# Altium PCB PCB1.PcbDoc (part 1 of 2)
Units mm, origin at the board's own origin, x right, y up, seen from the top; angles counter-clockwise.
Board outline 100 x 47.75 mm, 2 copper layers (Top Layer, Bottom Layer), stack 1.67 mm thick; 77 components, 59 nets, 309 pads, 126 vias.
Unrouted connection lines stored in the file: 4.
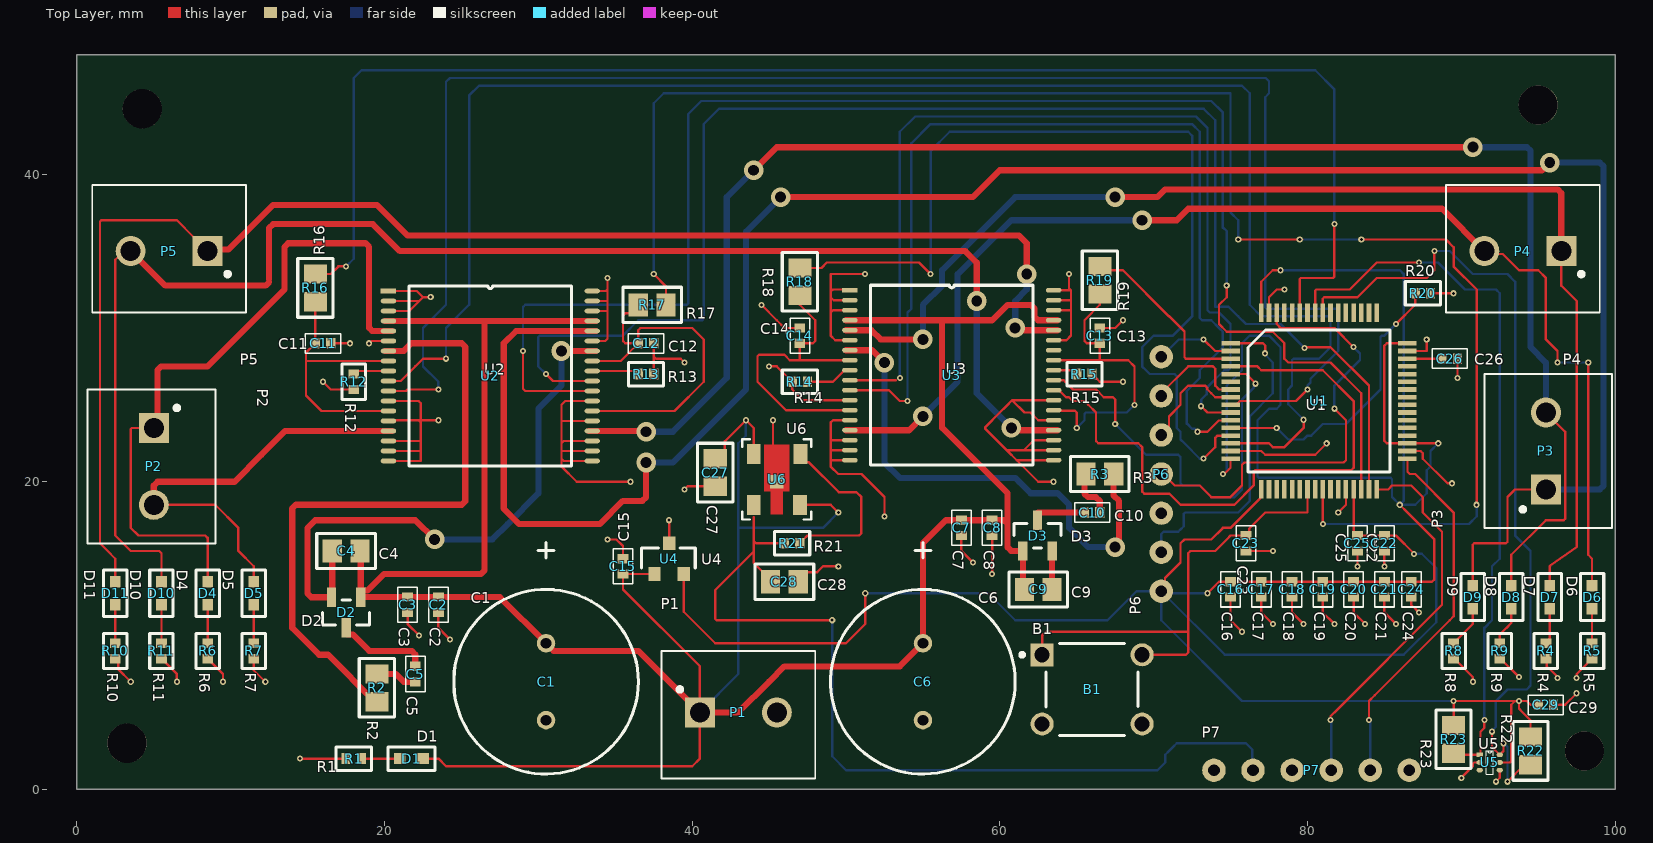
[diagram p0: Top Layer view]
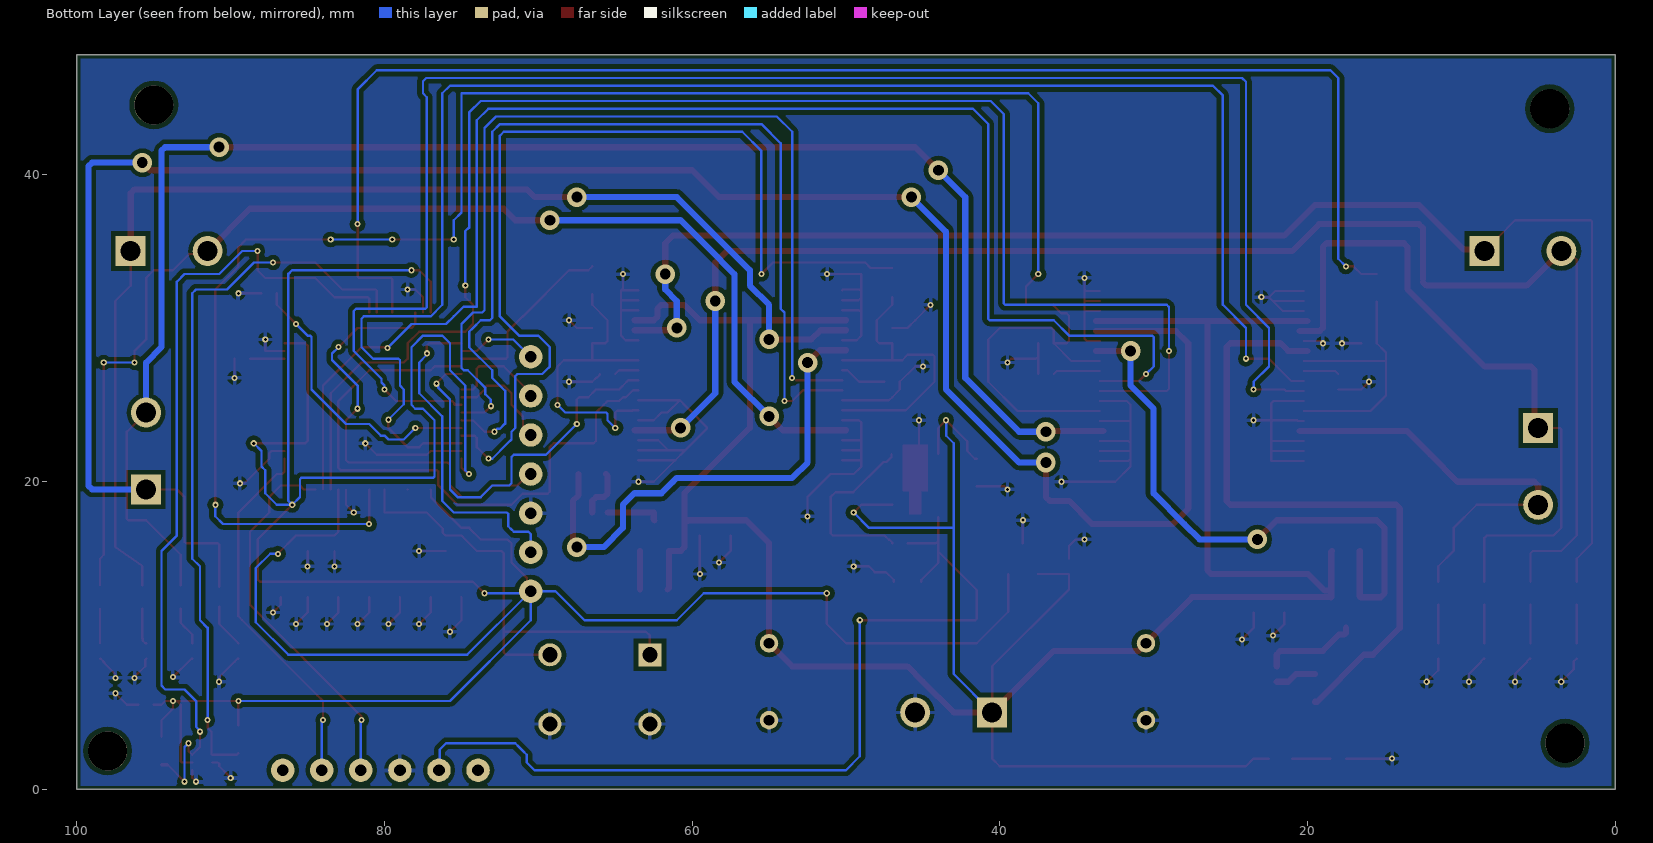
[diagram p1: Bottom Layer view, seen from below]

## Layer stack, top to bottom
Top Solder: solder mask 0.0254, SM-001, Dk 4
Top Layer: signal copper 0.035
Dielectric 1: core 1.6, Core-043, Dk 4.3
Bottom Layer: signal copper 0.035
Bottom Solder: solder mask 0.0254, SM-001, Dk 4

## Board outline
0,0 0,47.75 100,47.75 100,0

## Design rules (kind name [scope] priority, off if disabled: settings)
Clearance [All] p1: gap=0.3 ignorepadtopadclearanceinfootprint=TRUE except(0.01: Arc-SMDPad Arc-THPad Track-SMDPad Track-THPad; 0.2: Arc-Arc Arc-Track Track-Track)
PolygonConnect [All] p1: connectstyle=Relief reliefconductorwidth=0.254 reliefentries=4 polygonreliefangle="90 Angle" airgapwidth=0.254
RoutingVias [All] p1: holewidth=0.2 width=0.4 viastyle="Through Hole" minholewidth=0.2 minwidth=0.4 maxholewidth=0.6 maxwidth=1
SolderMaskExpansion [All] p1: expansion=0.102 istentingtop=FALSE
Width [All] p1: maxlimit=0.4 minlimit=0.15 preferedwidth=0.15 minimp=50.000000 maximp=50.000000 favimp=50.000000
30 further rules are at their usual default settings.

## Components (designator, comment, footprint, x,y, rotation, side; value= is the part's Value field where it differs from the comment)
B1 "RST" ResetButton 66,6.5 r0 top
C1 "100UF" 100UF 30.5,4.5 r90 top
C2 "100nF" "0402 Capacitor" 23.5,12 r270 top
C3 "100nF" "0402 Capacitor" 21.5,12 r270 top
C4 "220nF" "0805 Capacitor" 17.5,15.5 r0 top
C5 "10nF" "0402 Capacitor" 22,7.5 r270 top
C6 "100UF" 100UF 55,4.5 r90 top
C7 "100nF" "0402 Capacitor" 57.5,17 r270 top
C8 "100nF" "0402 Capacitor" 59.5,17 r270 top
C9 "220nF" "0805 Capacitor" 62.5,13 r0 top
C10 "10nF" "0402 Capacitor" 66,18 r0 top
C11 "5.6nF" "0402 Capacitor" 16,29 r0 top
C12 "5.6nF" "0402 Capacitor" 37,29 r0 top
C13 "5.6nF" "0402 Capacitor" 66.5,29.5 r270 top
C14 "5.6nF" "0402 Capacitor" 47,29.5 r270 top
C15 "100nF" "0402 Capacitor" 35.5,14.5 r90 top
C16 "100nF" "0402 Capacitor" 75,13 r270 top
C17 "100nF" "0402 Capacitor" 77,13 r270 top
C18 "100nF" "0402 Capacitor" 79,13 r270 top
C19 "100nF" "0402 Capacitor" 81,13 r270 top
C20 "100nF" "0402 Capacitor" 83,13 r270 top
C21 "100nF" "0402 Capacitor" 85,13 r270 top
C22 "100nF" "0402 Capacitor" 85,16 r270 top
C23 "100nF" "0402 Capacitor" 76,16 r270 top
C24 "4.7UF" "0402 Capacitor" 86.75,13 r270 top
C25 "1UF" "0402 Capacitor" 83.25,16 r270 top
C26 "4.7UF" "0402 Capacitor" 89.25,28 r0 top
C27 "10UF" "0805 Capacitor" 41.5,20.6 r270 top
C28 "10UF" "0805 Capacitor" 46,13.5 r0 top
C29 "10nF" "0402 Capacitor" 95.5,5.5 r0 top
D1 "GreenLED" LED 21.75,2 r180 top
D2 "BAR43S" "Double Diode" 17.5,11.5 r270 top
D3 "BAR43S" "Double Diode" 62.45,16.495 r90 top
D4 "YellowLED" LED 8.5,12.75 r270 top
D5 "YellowLED" LED 11.5,12.75 r270 top
D6 "YellowLED" LED 98.5,12.5 r270 top
D7 "YellowLED" LED 95.75,12.5 r270 top
D8 "YellowLED" LED 93.25,12.5 r270 top
D9 "YellowLED" LED 90.75,12.5 r270 top
D10 "YellowLED" LED 5.5,12.75 r270 top
D11 "YellowLED" LED 2.5,12.75 r270 top
P1 "Terminal Block" PHOENIX_1935161 43,5 r0 top
P2 "Terminal Block" PHOENIX_1935161 5,21 r270 top
P3 "Terminal Block" PHOENIX_1935161 95.5,22 r90 top
P4 "Terminal Block" PHOENIX_1935161 94,35 r180 top
P5 "Terminal Block" PHOENIX_1935161 6,35 r180 top
P6 "SWD/JTAG" FemaleSocketHeaders 71.5,12.88 r90 top
P7 "HC-05" 6FemaleSocketHeaders 73.92,0.25 r0 top
R1 "1.4k" "0402 Resistor" 18,2 r180 top
R2 "100R" "0805 Resistor" 19.5,6.6 r270 top
R3 "100R" "0805 Resistor" 66.5,20.5 r0 top
R4 "10k" "0402 Resistor" 95.5,9 r270 top
R5 "10k" "0402 Resistor" 98.5,9 r270 top
R6 "10k" "0402 Resistor" 8.5,9 r270 top
R7 "10k" "0402 Resistor" 11.5,9 r270 top
R8 "10k" "0402 Resistor" 89.5,9 r270 top
R9 "10k" "0402 Resistor" 92.5,9 r270 top
R10 "10k" "0402 Resistor" 2.5,9 r270 top
R11 "10k" "0402 Resistor" 5.5,9 r270 top
R12 "5.1k" "0402 Resistor" 18,26.5 r270 top
R13 "5.1k" "0402 Resistor" 37,27 r0 top
R14 "5.1k" "0402 Resistor" 47,26.5 r0 top
R15 "5.1k" "0402 Resistor" 65.5,27 r180 top
R16 "100k" "0805 Resistor" 15.5,32.6 r90 top
R17 "100k" "0805 Resistor" 37.4,31.5 r0 top
R18 "100k" "0805 Resistor" 47,33 r90 top
R19 "100k" "0805 Resistor" 66.5,33.1 r90 top
R20 "10k" "0402 Resistor" 87.5,32.25 r0 top
R21 "10k" "0402 Resistor" 46.5,16 r0 top
R22 "5k" "0805 Resistor" 94.5,2.5 r90 top
R23 "5k" "0805 Resistor" 89.5,3.25 r270 top
U1 "STM32F401RE" STM32F401RE 77,19.5 r0 top
U2 "L6206PD" L6206PD 20.25,32.4 r0 top
U3 "L6206PD" L6206PD 50.25,32.45 r0 top
U4 "NCV51460SN33T1G" LDO 38.5,14 r180 top
U5 "TMP102AQDRLRQ1" SOP6 91.2,2.25 r0 top
U6 "S-875065CUP-ACIT2U" SOT-89-5 45.5,20.15 r0 top

## Footprints (in the part's own frame and the unit in brackets; to place one, negate y for a bottom-side part, rotate by r counter-clockwise, add the part's x,y. Pads: shape width x height; smd on the part's side, far side on the other; paste and mask are expansions set on the pad)
6FemaleSocketHeaders [mil]
  round 60 hole 30: 1(0,39.37) 2(100,39.37) 3(200,39.37) 4(300,39.37) 5(400,39.37) 6(500,39.37)
  body extent -59,33 575,1886, height 274
100UF [mm]
  round 1.2 hole 0.7: 1(0,0) 2(5,0)
  silkscreen extent -3.5,-6 11.55,6, body extent -2.5,-5 7.5,5, height 12.01
"0402 Capacitor" [mm]
  rect 0.6x0.7 smd: 1(-0.5,0) 2(0.5,0)
  silkscreen extent -1.14,-0.64 1.14,0.64, body extent -0.5,-0.26 0.5,0.24, height 0.26
"0402 Resistor" [mm]
  rect 0.6x0.7 smd: 1(-0.5,0) 2(0.5,0)
  silkscreen extent -1.14,-0.76 1.14,0.76, body extent -0.5,-0.25 0.5,0.25, height 0.36
"0805 Capacitor" [mm]
  rect 1.25x1.5 smd: 1(-0.9,0) 2(0.9,0)
  silkscreen extent -1.91,-1.14 1.91,1.14, body extent -1.1,-0.73 1.1,0.72, height 0.89
"0805 Resistor" [mm]
  rect 1.25x1.5 smd: 1(-0.9,0) 2(0.9,0)
  silkscreen extent -1.91,-1.14 1.91,1.14, body extent -1.02,-0.62 0.98,0.62, height 0.61
"Double Diode" [mm]
  rect 1.26x0.61 smd paste+0 mask+0: 1(-0.995,0.95) 2(-0.995,-0.95) 3(0.995,0)
  silkscreen extent -0.8,-1.52 0.8,1.52, body extent -1.73,-1.62 1.73,1.62, height 0.25
FemaleSocketHeaders [mil]
  round 60 hole 30: 1(0,39.37) 2(100,39.37) 3(200,39.37) 4(300,39.37) 5(400,39.37) 6(500,39.37) 7(600,39.37)
  body extent -62,-7 658,93, height 335
L6206PD [mm]
  rect 1x0.3 smd: 1(0,0)
  oval 1x0.3 smd: 2(0,-0.65) 3(0,-1.3) 4(0,-1.95) 5(0,-2.6) 6(0,-3.25) 7(0,-3.9) 8(0,-4.55) 9(0,-5.2) 10(0,-5.85) 11(0,-6.5) 12(0,-7.15) 13(0,-7.8) 14(0,-8.45) 15(0,-9.1) 16(0,-9.75) 17(0,-10.4) 18(0,-11.05) 19(13.25,-11.05) 20(13.25,-10.4) 21(13.25,-9.75) 22(13.25,-9.1) 23(13.25,-8.45) 24(13.25,-7.8) 25(13.25,-7.15) 26(13.25,-6.5) 27(13.25,-5.85) 28(13.25,-5.2) 29(13.25,-4.55) 30(13.25,-3.9) 31(13.25,-3.25) 32(13.25,-2.6) 33(13.25,-1.95) 34(13.25,-1.3) 35(13.25,-0.65) 36(13.25,0)
  silkscreen extent 1.33,-11.38 11.92,0.33, body extent -0.36,-13.51 13.7,2.49, height 3.6
LDO [mm]
  rect 0.8x0.9 smd: A(-0.95,0) G(0,-2) K(0.95,0)
  silkscreen extent -1.7,-1.7 1.8,-0.4, body extent -1.44,-2.41 1.46,0.39, height 1.3
LED [mm]
  rect 0.75x0.7 smd: A(-0.75,0) K(0.75,0)
  silkscreen extent -1.52,-0.76 1.52,0.76, body extent -0.81,-0.4 0.81,0.4, height 0.6
PHOENIX_1935161 [mm]
  rect 1.95x1.95 hole 1.3: 1(-2.5,0)
  round 1.95 hole 1.3: 2(2.5,0)
  silkscreen extent -5,-4.3 5,4, body extent -5.76,-4.6 4.98,6.54, height 13.81
ResetButton [mm] "Switch, 4-Leads, Body 5.99x5.99mm"
  rect 1.5x1.5 hole 0.99: 1(-3.25,2.25)
  round 1.5 hole 0.99: 2(3.25,2.25) 3(-3.25,-2.25) 4(3.25,-2.25)
  silkscreen extent -4.67,-2.99 2.99,3, body extent -3,-2.99 2.99,3, height 5
SOP6 [mm]
  rect 0.4x0.3 smd: 1(0,0)
  oval 0.4x0.3 smd: 2(0,-0.5) 3(0,-1) 4(1.3,-1) 5(1.3,-0.5) 6(1.3,0)
  silkscreen extent 0.42,-1.25 0.88,0.25, body extent -0.14,-1.31 1.46,0.29, height 0.6
SOT-89-5 [mm]
  rect 0.9x1.3 smd: 1(-1.5,-1.65) 3(1.5,-1.65) 4(1.548,1.652) 5(-1.5,1.652)
  rect 0.9x0.9 smd: 2(0,-0.15)
  Top Layer region: -0.817,2.25 0.816,2.25 0.816,-0.775 0.4,-0.775 0.4,-2.25 -0.401,-2.25 -0.401,-0.775 -0.817,-0.775
  silkscreen extent -2.25,-2.6 2.25,2.6, body extent -2.23,-2.2 2.27,2.3, height 1.55
STM32F401RE [mm]
  rect 0.3x1.2 smd: 1(0,0) 2(0.5,0) 3(1,0) 4(1.5,0) 5(2,0) 6(2.5,0) 7(3,0) 8(3.5,0) 9(4,0) 10(4.5,0) 11(5,0) 12(5.5,0) 13(6,0) 14(6.5,0) 15(7,0) 16(7.5,0) 33(7.5,11.5) 34(7,11.5) 35(6.5,11.5) 36(6,11.5) 37(5.5,11.5) 38(5,11.5) 39(4.5,11.5) 40(4,11.5) 41(3.5,11.5) 42(3,11.5) 43(2.5,11.5) 44(2,11.5) 45(1.5,11.5) 46(1,11.5) 47(0.5,11.5) 48(0,11.5)
  rect 1.2x0.3 smd: 17(9.5,2) 18(9.5,2.5) 19(9.5,3) 20(9.5,3.5) 21(9.5,4) 22(9.5,4.5) 23(9.5,5) 24(9.5,5.5) 25(9.5,6) 26(9.5,6.5) 27(9.5,7) 28(9.5,7.5) 29(9.5,8) 30(9.5,8.5) 31(9.5,9) 32(9.5,9.5) 49(-2,9.5) 50(-2,9) 51(-2,8.5) 52(-2,8) 53(-2,7.5) 54(-2,7) 55(-2,6.5) 56(-2,6) 57(-2,5.5) 58(-2,5) 59(-2,4.5) 60(-2,4) 61(-2,3.5) 62(-2,3) 63(-2,2.5) 64(-2,2)
  silkscreen extent -0.87,1.13 8.36,10.36, body extent -2.26,-0.27 9.74,11.73, height 1.41

## Part data
B1: library part "Reset Button", "SWITCH TACTILE SPST-NO 0.05A 24V", Contact Current Rating=50mA, Contact Resistance=100mR, Manufacturer="TE Connectivity Alcoswitch", Manufacturer Part Number=1825910-6, Max Operating Temperature=85°C, Max Voltage Rating (DC)=24V, Min Operating Temperature=-35°C, Operating Force=160gf, Package Quantity=750, Supplier Part Number 1=450-1650-ND, Actuator Length=0.055inch, Actuator Material=PBT, Actuator Type=Standard, Category="Pushbutton Switches", ComponentLink1Description=https://datasheet.ciiva.com/30199/1825910-6rqpn1825910-6-30199520.pdf?src-supplier=Onlinecomponents.com, ComponentLink1URL=https://datasheet.ciiva.com/30199/1825910-6rqpn1825910-6-30199520.pdf?src-supplier=Onlinecomponents.com, ComponentLink2Description=https://datasheet.ciiva.com/15184/getdatasheetpartid-395915-15184509.pdf?src-supplier=Verical, ComponentLink2URL=https://datasheet.ciiva.com/15184/getdatasheetpartid-395915-15184509.pdf?src-supplier=Verical, Contact Material="Copper Alloy", Contact Plating=Silver, Electrical Life=100000Cycles, ELV=Compliant, Illumination Type=Non-Illuminated,Illuminated, Lead Free="Lead Free", Length=5.99mm, Max Current Rating=50mA, Mechanical Life=100000Cycles, Mount="Through Hole", Orientation=Straight, Packaging="Loose Piece", Pricing 1="1=0.10000, 10=0.10100, 25=0.09560, 100=0.08700, 250=0.08180, 500=0.07484, 1000=0.06265, 2500=0.06092, 5000=0.05743 (USD)", REACH SVHC=Unknown, RoHS=Yes, Stock 1=8444, Supplier 1=Digi-Key, Switch Function=Off-Mom, Switch Travel=0.25mm, Termination="PC Pins", Throw Configuration=SPST, Type=Switch
C1 C6: library part "100UF Capacitor", "Nichicon Aluminium Electrolytic Capacitor 100F 63 V 10mm Through Hole series VZ lifetime 1000h", Capacitance=100uF, Case/Package=Radial, Leakage Current=189uA, Manufacturer=Nichicon, Manufacturer Part Number=UVZ1J101MPD1TD, Max Operating Temperature=105°C, Min Operating Temperature=-55°C, Package Quantity=500, Ripple Current=215mA, Supplier Part Number 1=493-13479-1-ND, Tolerance=20%, Voltage=63V, Category="Aluminum Electrolytic Capacitors", ComponentLink1Description=https://datasheet.ciiva.com/46393/1909357-46393465.pdf?src-supplier=Element14, ComponentLink1URL=https://datasheet.ciiva.com/46393/1909357-46393465.pdf?src-supplier=Element14, ComponentLink2Description=https://datasheet.ciiva.com/7907/e-vz-7907564.pdf?src-supplier=Element14, ComponentLink2URL=https://datasheet.ciiva.com/7907/e-vz-7907564.pdf?src-supplier=Element14, ComponentLink3Description=https://datasheet.ciiva.com/29546/e-vz-29546636.pdf?src-supplier=Digi-Key, ComponentLink3URL=https://datasheet.ciiva.com/29546/e-vz-29546636.pdf?src-supplier=Digi-Key, ComponentLink4Description=https://datasheet.ciiva.com/29546/e-vz-29546635.pdf?src-supplier=Digi-Key, ComponentLink4URL=https://datasheet.ciiva.com/29546/e-vz-29546635.pdf?src-supplier=Digi-Key, Diameter=10mm, Dissipation Factor=0.1%, Height=12.5mm, Height - Seated (Max)=0.551inch, Lead Diameter=0.6mm, Lead Free="Lead Free", Lead Pitch=5mm, Lead/Base Style=Straight, Length=12.5mm, Life (Hours)=1000Hour, Mount="Through Hole,PCB", Packaging="Tape and Reel", Pricing 1="1=0.42000, 10=0.29000, 100=0.17420 (USD)", REACH SVHC="No SVHC", RoHS=Yes, Stock 1=4350, Supplier 1=Digi-Key, Termination=Radial, Voltage Rating=63V, Voltage Rating (DC)=63V
C2 C3 C7 C8 C15 C16 C17 C18 C19 C20 C21 C22 C23: library part "100nF Capacitor", "CAP CER 0.1UF 16V X7R 0402", Case Code (Imperial)=0402, Case Code (Metric)=1005, Dielectric=X7R, Manufacturer=Murata, Manufacturer Part Number=GRM155R71C104KA88J, Max Operating Temperature=125°C, Min Operating Temperature=-55°C, Package Quantity=1, Supplier Part Number 1=490-6328-1-ND, Tolerance=10%, Voltage=16V, Capacitance=100nF, Case/Package=0402, Category="Ceramic Capacitors", ComponentLink1Description=https://datasheet.ciiva.com/6271/product-6271168.pdf?src-supplier=Digi-Key, ComponentLink1URL=https://datasheet.ciiva.com/6271/product-6271168.pdf?src-supplier=Digi-Key, ComponentLink2Description=https://datasheet.ciiva.com/6271/grm155r71c104ka88-01-6271231.pdf?src-supplier=Digi-Key, ComponentLink2URL=https://datasheet.ciiva.com/6271/grm155r71c104ka88-01-6271231.pdf?src-supplier=Digi-Key, Depth=0.5mm, Height=0.5mm, Lead Free="Lead Free", Length=1mm, Mount="Surface Mount", Packaging="Tape and Reel", Pricing 1="1=0.10000, 10=0.03800, 100=0.01680, 500=0.01198, 1000=0.00941, 2500=0.00855, 5000=0.00787 (USD)", Radiation Hardening=No, REACH SVHC="No SVHC", RoHS=Yes, Stock 1=24888178, Supplier 1=Digi-Key, Termination=SMD/SMT, Thickness=0.022inch, Voltage Rating=16V, Voltage Rating (DC)=16V, Width=0.02inch
C4 C9: library part "220nF Capacitor", "CAP CER 0805 220NF 100V X7R", Case/Package=0805, Manufacturer=KEMET, Manufacturer Part Number=C0805C224K1RECAUTO, Max Operating Temperature=125°C, Min Operating Temperature=-55°C, Ratings=AEC-Q200, Supplier Part Number 1=399-17890-1-ND, Tolerance=10%, Voltage Rating=100V, Capacitance=220nF, Category="Ceramic Capacitors", ComponentLink1Description=https://api.kemet.com/component-edge/download/datasheet/C0805C224K1RECAUTO.pdf?src-supplier=Digi-Key, ComponentLink1URL=https://api.kemet.com/component-edge/download/datasheet/C0805C224K1RECAUTO.pdf?src-supplier=Digi-Key, Mount="Surface Mount", Packaging="Cut Tape", Pricing 1="1=0.30000, 10=0.20400, 100=0.11580, 500=0.08172, 1000=0.07151 (USD)", RoHS=No, Stock 1=6983, Supplier 1=Digi-Key
C5 C10 C29: library part "10nF Capacitor", "CAP CER 10000PF 50V X7R 0402", Case Code (Imperial)=0402, Case Code (Metric)=1005, Dielectric=X7R, Dielectric Material=Ceramic, Manufacturer=KEMET, Manufacturer Part Number=C0402C103M5RACTU, Max Operating Temperature=125°C, Min Operating Temperature=-55°C, Package Quantity=10000, Supplier Part Number 1=399-7760-1-ND, Tolerance=20%, Voltage Rating=50V, Capacitance=10nF, Case/Package=0402, Category="Ceramic Capacitors", ComponentLink1Description=https://datasheet.ciiva.com/18192/getdatasheetpartid-439437-18192407.pdf?src-supplier=Verical, ComponentLink1URL=https://datasheet.ciiva.com/18192/getdatasheetpartid-439437-18192407.pdf?src-supplier=Verical, ComponentLink2Description=https://datasheet.ciiva.com/5414/kem-c1002-x7r-smd-5414682.pdf?src-supplier=Mouser, ComponentLink2URL=https://datasheet.ciiva.com/5414/kem-c1002-x7r-smd-5414682.pdf?src-supplier=Mouser, Depth=0.5mm, Dissipation Factor=2.5%, Height=0.5mm, Lead Pitch=0.3mm, Length=1mm, Mount="Surface Mount", Packaging="Tape and Reel", Pricing 1="1=0.10000, 10=0.02200, 100=0.00990, 500=0.00708, 1000=0.00557, 2500=0.00506, 5000=0.00466 (USD)", Radiation Hardening=No, RoHS=Yes, Stock 1=104917, Supplier 1=Digi-Key, Termination=SMD/SMT, Thickness=0.022inch, Voltage Rating (DC)=50V, Width=0.02inch
C11 C12 C13 C14: library part "5.6nF Capacitor", "CAP CER 5600PF 25V X7R 0402", Case Code (Imperial)=0402, Case Code (Metric)=1005, Dielectric=X7R, Manufacturer=Yageo, Manufacturer Part Number=CC0402KRX7R8BB562, Max Operating Temperature=125°C, Min Operating Temperature=-55°C, Supplier Part Number 1=311-1718-1-ND, Tolerance=10%, Voltage Rating=25V, Capacitance=5.6nF, Case/Package=0402, Category="Ceramic Capacitors", ComponentLink1Description=https://datasheet.ciiva.com/13264/upy-gphc-x7r-6-3v-to-50v-8-12304-13264955.pdf?src-supplier=Mouser, ComponentLink1URL=https://datasheet.ciiva.com/13264/upy-gphc-x7r-6-3v-to-50v-8-12304-13264955.pdf?src-supplier=Mouser, Composition=Ceramic, Depth=0.5mm, Halogen Free="Halogen Free", Lead Free="Lead Free", Length=0.039inch, Mount="Surface Mount", Number of Pins=2, Packaging="Tape and Reel", Pricing 1="1=0.10000, 10=0.03600, 100=0.01620, 500=0.01156, 1000=0.00908, 2500=0.00825, 5000=0.00759 (USD)", RoHS=Yes, Stock 1=20030, Supplier 1=Digi-Key, Termination=SMD/SMT, Thickness=0.022inch, Voltage Rating (DC)=25V, Weight=2.3E-05oz, Width=0.02inch
C24 C26: library part "4.7UF Capacitor", "CAP CER 4.7UF 6.3V X5R 0402", Capacitance=4.7uF, Case Code (Imperial)=0402, Case Code (Metric)=1005, Dielectric=X5R, Manufacturer=Murata, Manufacturer Part Number=GRM155R60J475ME47D, Max Operating Temperature=85°C, Min Operating Temperature=-55°C, Package Quantity=10000, Supplier Part Number 1=490-5915-1-ND, Tolerance=20%, Voltage=6.3V, Case/Package=0402, Category="Ceramic Capacitors", ComponentLink1Description=https://datasheet.ciiva.com/6270/product-6270483.pdf?src-supplier=Digi-Key, ComponentLink1URL=https://datasheet.ciiva.com/6270/product-6270483.pdf?src-supplier=Digi-Key, ComponentLink2Description=https://datasheet.ciiva.com/6268/partnumbering-e-01-6268378.pdf?src-supplier=Digi-Key, ComponentLink2URL=https://datasheet.ciiva.com/6268/partnumbering-e-01-6268378.pdf?src-supplier=Digi-Key, ComponentLink3Description=https://datasheet.ciiva.com/46418/1769893-46418044.pdf?src-supplier=Element14, ComponentLink3URL=https://datasheet.ciiva.com/46418/1769893-46418044.pdf?src-supplier=Element14, ComponentLink4Description=https://datasheet.ciiva.com/46418/1769893-46418045.pdf?src-supplier=Element14, ComponentLink4URL=https://datasheet.ciiva.com/46418/1769893-46418045.pdf?src-supplier=Element14, ComponentLink5Description=https://datasheet.ciiva.com/6268/partnumbering-e-01-6268382.pdf?src-supplier=Digi-Key, ComponentLink5URL=https://datasheet.ciiva.com/6268/partnumbering-e-01-6268382.pdf?src-supplier=Digi-Key, Contact Plating=Tin, Depth=0.5mm, Height=0.5mm, Lead Free="Lead Free", Length=1mm, Mount="Surface Mount", Packaging="Tape and Reel", Pricing 1="1=0.16000, 10=0.11600, 100=0.05450, 500=0.03822, 1000=0.03164, 2500=0.02944, 5000=0.02694 (USD)", REACH SVHC="No SVHC", RoHS=Yes, Stock 1=22068943, Supplier 1=Digi-Key, Termination=SMD/SMT, Thickness=0.022inch, Voltage Rating=6.3V, Voltage Rating (DC)=6.3V, Weight=0.000212oz, Width=0.02inch
C25: library part "1UF Capacitor", "Multilayer Ceramic Capacitors MLCC - SMD/SMT 1uF 6.3V X6S +/-10% 0402 Gen Purp", Capacitance=1uF, Case Code (Imperial)=0402, Case Code (Metric)=1005, Dielectric=X6S, Manufacturer="Taiyo Yuden", Manufacturer Part Number=JMK105C6105KV-F, Max Operating Temperature=105°C, Min Operating Temperature=-55°C, Package Quantity=10000, Supplier Part Number 1=587-3381-1-ND, Tolerance=10%, Voltage Rating=6.3V, Case/Package=0402, Category="Ceramic Capacitors", ComponentLink1Description=https://datasheet.ciiva.com/30179/154jmk105c6105kv-f-30179507.pdf?src-supplier=Onlinecomponents.com, ComponentLink1URL=https://datasheet.ciiva.com/30179/154jmk105c6105kv-f-30179507.pdf?src-supplier=Onlinecomponents.com, ComponentLink2Description=https://datasheet.ciiva.com/24435/5jmk105c6105kv-f-24435453.pdf?src-supplier=Onlinecomponents.com, ComponentLink2URL=https://datasheet.ciiva.com/24435/5jmk105c6105kv-f-24435453.pdf?src-supplier=Onlinecomponents.com, ComponentLink3Description=https://datasheet.ciiva.com/18700/mlcc-all-e-18700341.pdf?src-supplier=Digi-Key, ComponentLink3URL=https://datasheet.ciiva.com/18700/mlcc-all-e-18700341.pdf?src-supplier=Digi-Key, ComponentLink4Description=https://datasheet.ciiva.com/18700/mlcc-all-e-18700342.pdf?src-supplier=Digi-Key, ComponentLink4URL=https://datasheet.ciiva.com/18700/mlcc-all-e-18700342.pdf?src-supplier=Digi-Key, ComponentLink5Description=https://datasheet.ciiva.com/18700/mlcc-all-e-18700343.pdf?src-supplier=Digi-Key, ComponentLink5URL=https://datasheet.ciiva.com/18700/mlcc-all-e-18700343.pdf?src-supplier=Digi-Key, Composition=Ceramic, Contact Plating=Tin, Halogen Free="Halogen Free", Height=0.5mm, Lead Free="Lead Free", Length=1mm, Mount="Surface Mount", Packaging="Tape and Reel", Pricing 1="1=0.10000, 10=0.04200, 100=0.01860, 500=0.01328, 1000=0.01044, 2500=0.00949, 5000=0.00873 (USD)", RoHS=Yes, Stock 1=2218230, Supplier 1=Digi-Key, Termination=SMD/SMT, Thickness=0.022inch, Voltage Rating (DC)=6.3V, Width=0.02inch
C27 C28: library part "10UF Capacitor", "Ceramic capacitor SMD 0805 10 µF 16 V 10 %", Capacitance=10uF, Case Code (Imperial)=0805, Case Code (Metric)=2012, Dielectric=X5R, Manufacturer=Samsung, Manufacturer Part Number=CL21A106KOQNNNG, Max Operating Temperature=85°C, Min Operating Temperature=-55°C, Package Quantity=3000, Supplier Part Number 1=1276-6455-1-ND, Tolerance=10%, Voltage=16V, Case/Package=0805, Category="Ceramic Capacitors", ComponentLink1Description=https://datasheet.ciiva.com/25730/cl21a106koqnnng-25730226.pdf?src-supplier=Digi-Key, ComponentLink1URL=https://datasheet.ciiva.com/25730/cl21a106koqnnng-25730226.pdf?src-supplier=Digi-Key, ComponentLink2Description=https://datasheet.ciiva.com/29199/454932-da-01-en-vs-kondensator-0805-29199423.pdf?src-supplier=Conrad, ComponentLink2URL=https://datasheet.ciiva.com/29199/454932-da-01-en-vs-kondensator-0805-29199423.pdf?src-supplier=Conrad, Depth=1.25mm, Height=1.25mm, Length=2mm, Material=Ceramic, Mount="Surface Mount", Packaging="Tape and Reel", Pricing 1="1=0.11000, 10=0.07600, 50=0.04340, 100=0.03590, 500=0.02516, 1000=0.02083 (USD)", RoHS=Yes, Stock 1=97074, Supplier 1=Digi-Key, Thickness=0.053inch, Voltage Rating=16V, Width=0.049inch
D1: "LED GREEN CLEAR SMD", Case Code (Imperial)=0603, Case Code (Metric)=1608, Color=Green, Forward Current=5mA, Forward Voltage=2V, Lens Color=Colorless, Manufacturer=Lumex, Manufacturer Part Number=SML-LXFP0603SUGCTR, Max Operating Temperature=85°C, Min Operating Temperature=-40°C, Package Quantity=3000, Power Rating=30mW, Reverse Voltage (DC)=5V, Supplier Part Number 1=67-2222-1-ND, Case/Package=0603, Category=LEDs, ComponentLink1Description=https://datasheet.ciiva.com/24152/sml-lxfp0603sugctr-272463-24152468.pdf?src-supplier=Mouser, ComponentLink1URL=https://datasheet.ciiva.com/24152/sml-lxfp0603sugctr-272463-24152468.pdf?src-supplier=Mouser, ComponentLink2Description=https://datasheet.ciiva.com/29559/sml-lxfp0603sugctr-29559740.pdf?src-supplier=Digi-Key, ComponentLink2URL=https://datasheet.ciiva.com/29559/sml-lxfp0603sugctr-29559740.pdf?src-supplier=Digi-Key, Height=0.2mm, Illumination Color=Green, Length=1.6mm, Lens Style=Rectangular, Lens Transparency=Clear, Luminous Intensity=13mcd, Mount="Surface Mount", Packaging="Tape and Reel", Pricing 1="1=0.43000, 10=0.30000, 100=0.17500, 500=0.12000, 1000=0.10000 (USD)", RoHS=Yes, Stock 1=9865, Supplier 1=Digi-Key, Test Current=5mA, Viewing Angle=130°, Wavelength=574nm, Width=0.8mm
D2 D3: library part "Diode Series", "STMICROELECTRONICS - BAR43SFILM - Small Signal Schottky Diode, Dual Series, 30 V, 100 mA, 330 mV, 750 mA, 150 C RoHS Compliant: Yes", Average Rectified Current=100mA, Capacitance=7pF, Case/Package=SOT-23, Forward Voltage=1V, Manufacturer=STMicroelectronics, Manufacturer Part Number=BAR43SFILM, Max Forward Surge Current (Ifsm)=750mA, Max Operating Temperature=150°C, Max Repetitive Reverse Voltage (Vrrm)=30V, Max Reverse Leakage Current=500nA, Min Operating Temperature=-65°C, Package Quantity=3000, Power Dissipation=250mW, Supplier Part Number 1=497-2515-1-ND, Category="Rectifier Diodes", ComponentLink1Description=https://datasheet.ciiva.com/1177/1700360-1177600.pdf?src-supplier=Element14, ComponentLink1URL=https://datasheet.ciiva.com/1177/1700360-1177600.pdf?src-supplier=Element14, ComponentLink2Description=https://datasheet.ciiva.com/4714/cd00000764-105363-4714418.pdf?src-supplier=Mouser, ComponentLink2URL=https://datasheet.ciiva.com/4714/cd00000764-105363-4714418.pdf?src-supplier=Mouser, ComponentLink3Description=https://datasheet.ciiva.com/34301/924342-34301780.pdf?src-supplier=Jameco, ComponentLink3URL=https://datasheet.ciiva.com/34301/924342-34301780.pdf?src-supplier=Jameco, ComponentLink4Description=https://datasheet.ciiva.com/905/cd00000764-905875.pdf?src-supplier=Digi-Key, ComponentLink4URL=https://datasheet.ciiva.com/905/cd00000764-905875.pdf?src-supplier=Digi-Key, ComponentLink5Description=https://datasheet.ciiva.com/905/cd00000764-905876.pdf?src-supplier=Digi-Key, ComponentLink5URL=https://datasheet.ciiva.com/905/cd00000764-905876.pdf?src-supplier=Digi-Key, ComponentLink6Description=https://datasheet.ciiva.com/905/cd00000764-905877.pdf?src-supplier=Digi-Key, ComponentLink6URL=https://datasheet.ciiva.com/905/cd00000764-905877.pdf?src-supplier=Digi-Key, ComponentLink7Description=https://datasheet.ciiva.com/7964/1700360-7964102.pdf?src-supplier=Element14, ComponentLink7URL=https://datasheet.ciiva.com/7964/1700360-7964102.pdf?src-supplier=Element14, ComponentLink8Description=https://datasheet.ciiva.com/1200/1700360-1200008.pdf?src-supplier=Farnell, ComponentLink8URL=https://datasheet.ciiva.com/1200/1700360-1200008.pdf?src-supplier=Farnell, ComponentLink9Description=https://datasheet.ciiva.com/1199/1700360-1199962.pdf?src-supplier=Farnell, ComponentLink9URL=https://datasheet.ciiva.com/1199/1700360-1199962.pdf?src-supplier=Farnell, ComponentLink10Description=https://datasheet.ciiva.com/15144/getdatasheetpartid-39351-15144075.pdf?src-supplier=Verical, ComponentLink10URL=https://datasheet.ciiva.com/15144/getdatasheetpartid-39351-15144075.pdf?src-supplier=Verical, ComponentLink11Description=https://datasheet.ciiva.com/16226/cd00000764-16226780.pdf?src-supplier=Future+Electronics, ComponentLink11URL=https://datasheet.ciiva.com/16226/cd00000764-16226780.pdf?src-supplier=Future+Electronics, ComponentLink12Description=https://datasheet.ciiva.com/27746/47-2902e-27746700.pdf?src-supplier=Rapid+Electronics, ComponentLink12URL=https://datasheet.ciiva.com/27746/47-2902e-27746700.pdf?src-supplier=Rapid+Electronics, Current Rating=100mA, Element Configuration=Dual, Forward Current=100mA, Height=0.95mm, Lead Free="Lead Free", Length=2.9mm, Max Reverse Voltage (DC)=30V, Max Surge Current=750mA, Mount="Surface Mount", Number of Pins=3, Packaging="Tape and Reel", Peak Non-Repetitive Surge Current=750mA, Peak Reverse Current=500nA, Pricing 1="1=0.37000, 10=0.29900, 25=0.25040, 100=0.12230, 250=0.12036, 500=0.10202, 1000=0.07089 (USD)", Radiation Hardening=No, REACH SVHC="No SVHC", Recovery Time=5ns, Reverse Recovery Time=5ns, RoHS=Yes, Stock 1=25965, Supplier 1=Digi-Key, Termination=SMD/SMT, Voltage Rating (DC)=30V, Weight=0.01lb, Width=3.05mm
D4 D5 D6 D7 D8 D9 D10 D11: "Led Yellow Clear 0603 SMD", Case Code (Imperial)=0603, Case Code (Metric)=1608, Color=Yellow, Forward Voltage=2V, Lens Color=Clear, Manufacturer=Inolux, Manufacturer Part Number=IN-S63AT5Y, Supplier Part Number 1=1830-1066-1-ND, Test Current=5mA, Case/Package=0603, Category=LEDs, ComponentLink1Description=http://www.inolux-corp.com/datasheet/SMDLED/Mono%20Color%20Top%20View/IN-S63AT%20Series_V1.1.pdf?src-supplier=Digi-Key, ComponentLink1URL=http://www.inolux-corp.com/datasheet/SMDLED/Mono%20Color%20Top%20View/IN-S63AT%20Series_V1.1.pdf?src-supplier=Digi-Key, Dominant Wavelength=589nm, Height=0.39mm, Length=1.6mm, Lens Size=0.8mm, Lens Style=Flat, Lens Transparency=Clear, Luminous Intensity=23mcd, Mount="Surface Mount", Packaging="Tape and Reel", Pricing 1="1=0.32000, 10=0.23200, 100=0.10970, 500=0.07314, 1000=0.05729 (USD)", RoHS=No, Stock 1=6149, Supplier 1=Digi-Key, Viewing Angle=120°, Width=0.8mm
P1 P2 P3 P4 P5: library part 1935161, "Conn Terminal Blocks 2 POS 5mm Solder ST Thru-Hole 16A", Color=Green, Current=18A, Current Rating=17.5A, Flammability Rating="UL94 V-0", Manufacturer="Phoenix Contact", Max Current Rating=16A, Max Supply Voltage=250V, Package Quantity=250, Supplier Part Number 1=277-1667-ND, Voltage=300V, Voltage Rating (DC)=320V, Approvals=UL, Category="Terminal Blocks", ComponentLink1Description=https://datasheet.ciiva.com/15169/getdatasheetpartid-177903-15169663.pdf?src-supplier=Verical, ComponentLink1URL=https://datasheet.ciiva.com/15169/getdatasheetpartid-177903-15169663.pdf?src-supplier=Verical, ComponentLink2Description=https://datasheet.ciiva.com/16047/1935161-16047247.pdf?src-supplier=Onlinecomponents.com, ComponentLink2URL=https://datasheet.ciiva.com/16047/1935161-16047247.pdf?src-supplier=Onlinecomponents.com, ComponentLink3Description=https://datasheet.ciiva.com/824/combiconcompact5-0mmseries-824222.pdf?src-supplier=Digi-Key, ComponentLink3URL=https://datasheet.ciiva.com/824/combiconcompact5-0mmseries-824222.pdf?src-supplier=Digi-Key, Connector Type=Screw, Contact Material=Copper,Tin, Depth=9mm, Height=11.3mm, Housing Color=Green, Housing Material=Polyamide, Insulation Material=Nylon, Lead Free="Lead Free", Length=9mm, Manufacturer Part Number=1935161, Material=Nylon, Mount="Through Hole", Number of Circuits=2, Number of Contacts=2, Number of Levels=1, Number of Pins=2, Number of Poles=2, Number of Positions=2, Number of Positions Per Level=2, Number of Rows=1, Orientation=Straight, Packaging=Bulk, Pitch=5mm, Pricing 1="1=0.43000, 10=0.41100, 50=0.39280, 100=0.38200, 250=0.35700, 500=0.32844, 1000=0.30350 (USD)", Radiation Hardening=No, REACH SVHC=Unknown, RoHS=Yes, Stock 1=54304, Supplier 1=Digi-Key, Termination=Solder, Voltage Rating=250V, Weight=0.067021oz, Width=14.9mm, Wire Gauge (Max)=26AWG, Wire Gauge (Min)=12AWG, Wire/Cable Gauge=26AWG
P6: library part FemaleSockets, "CONN RCPT .100\" 7POS TIN PCB", Color=Black, Contact Resistance=10mR, Flammability Rating="UL94 V-0", Manufacturer=Samtec, Manufacturer Part Number=SSA-107-S-T, Max Current Rating=1A, Max Operating Temperature=105°C, Max Voltage Rating (AC)=1kV, Min Operating Temperature=-55°C, Package Quantity=1, Supplier Part Number 1=SAM1122-07-ND, Category=Connectors, ComponentLink1Description=https://datasheet.ciiva.com/413/ssas-mkt-413352.pdf?src-supplier=Digi-Key, ComponentLink1URL=https://datasheet.ciiva.com/413/ssas-mkt-413352.pdf?src-supplier=Digi-Key, ComponentLink2Description=https://datasheet.ciiva.com/10323/ssa-10323769.pdf?src-supplier=Avnet, ComponentLink2URL=https://datasheet.ciiva.com/10323/ssa-10323769.pdf?src-supplier=Avnet, ComponentLink3Description=https://datasheet.ciiva.com/26825/getdatasheetpartid-51286-26825370.pdf?src-supplier=Verical, ComponentLink3URL=https://datasheet.ciiva.com/26825/getdatasheetpartid-51286-26825370.pdf?src-supplier=Verical, ComponentLink4Description=https://datasheet.ciiva.com/16720/ssa-16720191.pdf?src-supplier=Avnet+Europe, ComponentLink4URL=https://datasheet.ciiva.com/16720/ssa-16720191.pdf?src-supplier=Avnet+Europe, Connector Type=Receptacle, Contact Material=Bronze, Contact Plating=Tin, Depth=2.54mm, Gender=Female, Housing Color=Black, Housing Material=Polyethylene, Lead Free="Lead Free", Length=17.78mm, Mount="Through Hole", Number of Contacts=7, Number of Positions=7, Number of Rows=1, Orientation=Straight, Packaging=Bulk, Pitch=2.54mm, Pricing 1="1=0.73000, 10=0.68500, 25=0.61680, 50=0.54820, 100=0.52530, 250=0.47960, 500=0.45676 (USD)", Radiation Hardening=No, RoHS=Yes, Stock 1=63, Supplier 1=Digi-Key, Termination=Solder, Width=2.54mm
P7: library part 6FemaleHeadersRight, "CONN HDR 6POS 0.1 TIN PCB R/A", Color=Black, Manufacturer=Sullins, Manufacturer Part Number=PPTC061LGBN-RC, Package Quantity=1000, Supplier Part Number 1=S5442-ND, Category=Connectors, ComponentLink1Description=https://media.digikey.com/pdf/Data%20Sheets/Sullins%20PDFs/Female_Headers.100_DS.pdf?src-supplier=Digi-Key, ComponentLink1URL=https://media.digikey.com/pdf/Data%20Sheets/Sullins%20PDFs/Female_Headers.100_DS.pdf?src-supplier=Digi-Key, Connector Type=Header,Socket, Contact Material=Bronze, Contact Plating=Tin, Height=2.4mm, Housing Color=Black, Housing Material=Plastic, Lead Free="Lead Free", Length=15.7mm, Mount="Through Hole", Number of Positions=6, Number of Rows=1, Packaging=Bulk, Pitch=0.1inch, Pricing 1="1=0.71000, 10=0.66400, 100=0.50920, 500=0.44280, 1000=0.36531, 5000=0.32103, 10000=0.31980 (USD)", RoHS=Yes, Stock 1=8367, Supplier 1=Digi-Key, Termination=Solder, Width=8.5mm
R1: library part "1.4k Resistor", "RES SMD 14K OHM 0.1% 1/16W 0402", Case Code (Imperial)=0402, Case Code (Metric)=1005, Manufacturer=Panasonic, Manufacturer Part Number=ERA-2AEB1402X, Max Operating Temperature=155°C, Max Power Dissipation=63mW, Min Operating Temperature=-55°C, Package Quantity=10000, Resistance=14kR, Supplier Part Number 1=P14KDCCT-ND, Temperature Coefficient=25ppm/°C, Tolerance=0.1%, Voltage Rating=25V, Voltage Rating (DC)=50V, Case/Package=0402, Category="Chip SMD Resistors", ComponentLink1Description=https://datasheet.ciiva.com/9193/aoa0000ce26-9193279.pdf?src-supplier=Avnet, ComponentLink1URL=https://datasheet.ciiva.com/9193/aoa0000ce26-9193279.pdf?src-supplier=Avnet, Composition="Metal Film,Thin Film", Contact Plating=Tin, Height=0.016inch, Lead Free="Lead Free", Length=0.039inch, Mount="Surface Mount", Number of Terminations=2, Packaging="Tape and Reel", Power Rating=63mW, Pricing 1="1=0.43000, 10=0.30500, 100=0.12220, 1000=0.06021, 2500=0.05579, 5000=0.05047 (USD)", Radiation Hardening=No, REACH SVHC=Unknown, RoHS=Yes, Stock 1=3069, Supplier 1=Digi-Key, Termination=SMD/SMT, Width=0.5mm
R2 R3: library part "100R Resistor", "RESISTOR, SURGE, 0805, 1%, 100R", Case Code (Imperial)=0805, Case Code (Metric)=2012, Manufacturer=Panasonic, Manufacturer Part Number=ERJ-P06F1000V, Max Operating Temperature=155°C, Min Operating Temperature=-55°C, Package Quantity=5000, Power Rating=500mW, Supplier Part Number 1=P16057CT-ND, Temperature Coefficient=100ppm/°C, Tolerance=1%, Voltage Rating=150V, Case/Package=0805, Category="Chip SMD Resistors", ComponentLink1Description=https://datasheet.ciiva.com/11817/0900766b812cb812-11817182.pdf?src-supplier=RSComponents, ComponentLink1URL=https://datasheet.ciiva.com/11817/0900766b812cb812-11817182.pdf?src-supplier=RSComponents, ComponentLink2Description=https://datasheet.ciiva.com/24070/aoa0000ce4-64075-24070038.pdf?src-supplier=Mouser, ComponentLink2URL=https://datasheet.ciiva.com/24070/aoa0000ce4-64075-24070038.pdf?src-supplier=Mouser, ComponentLink3Description=https://datasheet.ciiva.com/17208/aoa0000ce4-17208007.pdf?src-supplier=Avnet+Europe, ComponentLink3URL=https://datasheet.ciiva.com/17208/aoa0000ce4-17208007.pdf?src-supplier=Avnet+Europe, ComponentLink4Description=https://datasheet.ciiva.com/30103/aoa0000ce4-30103141.pdf?src-supplier=Onlinecomponents.com, ComponentLink4URL=https://datasheet.ciiva.com/30103/aoa0000ce4-30103141.pdf?src-supplier=Onlinecomponents.com, ComponentLink5Description=https://datasheet.ciiva.com/48426/erjp-series-eng-tds-48426777.pdf?src-supplier=Distrelec, ComponentLink5URL=https://datasheet.ciiva.com/48426/erjp-series-eng-tds-48426777.pdf?src-supplier=Distrelec, ComponentLink6Description=https://datasheet.ciiva.com/9186/aoa0000ce4-9186922.pdf?src-supplier=Avnet, ComponentLink6URL=https://datasheet.ciiva.com/9186/aoa0000ce4-9186922.pdf?src-supplier=Avnet, ComponentLink7Description=https://datasheet.ciiva.com/22758/1801181-22758282.pdf?src-supplier=Farnell, ComponentLink7URL=https://datasheet.ciiva.com/22758/1801181-22758282.pdf?src-supplier=Farnell, ComponentLink8Description=https://datasheet.ciiva.com/22758/1801181-22758283.pdf?src-supplier=Farnell, ComponentLink8URL=https://datasheet.ciiva.com/22758/1801181-22758283.pdf?src-supplier=Farnell, ComponentLink9Description=https://datasheet.ciiva.com/7830/1790600-7830815.pdf?src-supplier=Element14, ComponentLink9URL=https://datasheet.ciiva.com/7830/1790600-7830815.pdf?src-supplier=Element14, Composition="Thick Film", Contact Plating=Tin, Depth=1.25mm, Height=0.6mm, Length=2mm, Military Standard=Not, Mount="Surface Mount", Number of Pins=2, Packaging="Tape and Reel", Pricing 1="1=0.17000, 10=0.14800, 100=0.05770, 1000=0.02416, 2500=0.02214 (USD)", Radiation Hardening=No, REACH SVHC="No SVHC", Resistance=100R, RoHS=Yes, Stock 1=401308, Supplier 1=Digi-Key, Termination=SMD/SMT, Voltage Rating (DC)=150V, Width=1.2mm
R4 R5 R6 R7 R8 R9 R10 R11 R20 R21: library part "10k Resistor", "Res Thin Film 0402 10K Ohm 0.5% 0.063W(1/16W) ±25ppm/C Molded SMD Automotive Punched T/R", Case Code (Imperial)=0402, Case Code (Metric)=1005, Manufacturer=Panasonic, Manufacturer Part Number=ERA-2AED103X, Max Operating Temperature=155°C, Max Power Dissipation=63mW, Min Operating Temperature=-55°C, Package Quantity=10000, Resistance=10kR, Supplier Part Number 1=P10KDECT-ND, Temperature Coefficient=25ppm/°C, Tolerance=0.5%, Voltage Rating=25V, Case/Package=0402, Category="Chip SMD Resistors", ComponentLink1Description=https://datasheet.ciiva.com/30240/54aoa0000ce26-30240474.pdf?src-supplier=Onlinecomponents.com, ComponentLink1URL=https://datasheet.ciiva.com/30240/54aoa0000ce26-30240474.pdf?src-supplier=Onlinecomponents.com, ComponentLink2Description=https://datasheet.ciiva.com/46378/1776116-46378235.pdf?src-supplier=Element14, ComponentLink2URL=https://datasheet.ciiva.com/46378/1776116-46378235.pdf?src-supplier=Element14, ComponentLink3Description=https://datasheet.ciiva.com/7830/1776116-7830919.pdf?src-supplier=Element14, ComponentLink3URL=https://datasheet.ciiva.com/7830/1776116-7830919.pdf?src-supplier=Element14, ComponentLink4Description=https://datasheet.ciiva.com/43470/1776116-43470437.pdf?src-supplier=Farnell, ComponentLink4URL=https://datasheet.ciiva.com/43470/1776116-43470437.pdf?src-supplier=Farnell, Composition="Metal Film,Thin Film", Contact Plating=Tin, Depth=0.5mm, Height=0.016inch, Lead Free="Lead Free", Length=1mm, Military Standard=Not, Mount="Surface Mount", Number of Terminations=2, Packaging="Tape and Reel", Power Rating=63mW, Pricing 1="1=0.21000, 10=0.17900, 100=0.07000, 1000=0.02930, 2500=0.02686, 5000=0.02442 (USD)", REACH SVHC="No SVHC", RoHS=Yes, Stock 1=133108, Supplier 1=Digi-Key, Termination=SMD/SMT, Voltage Rating (DC)=25V, Weight=2.8E-05oz, Width=0.5mm
R12 R13 R14 R15: library part "5.1k Resistor", "PANASONIC - ERJ2RKF5101X - SMD Chip Resistor, 0402 [1005 Metric], 5.1 kohm, ERJ2R Series, 50 V, Thick Film, 100 mW", Case Code (Imperial)=0402, Case Code (Metric)=1005, Manufacturer=Panasonic, Manufacturer Part Number=ERJ-2RKF5101X, Max Operating Temperature=155°C, Max Power Dissipation=100mW, Min Operating Temperature=-55°C, Package Quantity=10000, Resistance=5.1kR, Supplier Part Number 1=P5.10KLCT-ND, Temperature Coefficient=100ppm/°C, Tolerance=1%, Voltage Rating=50V, Case/Package=0402, Category="Chip SMD Resistors", ComponentLink1Description=https://datasheet.ciiva.com/11821/0900766b80f80784-11821351.pdf?src-supplier=RSComponents, ComponentLink1URL=https://datasheet.ciiva.com/11821/0900766b80f80784-11821351.pdf?src-supplier=RSComponents, ComponentLink2Description=https://datasheet.ciiva.com/16788/70260748-16788554.pdf?src-supplier=Allied+Electronics, ComponentLink2URL=https://datasheet.ciiva.com/16788/70260748-16788554.pdf?src-supplier=Allied+Electronics, ComponentLink3Description=https://datasheet.ciiva.com/16761/70260748-16761739.pdf?src-supplier=Allied+Electronics, ComponentLink3URL=https://datasheet.ciiva.com/16761/70260748-16761739.pdf?src-supplier=Allied+Electronics, ComponentLink4Description=https://datasheet.ciiva.com/9195/aoa0000ce2-9195580.pdf?src-supplier=Avnet, ComponentLink4URL=https://datasheet.ciiva.com/9195/aoa0000ce2-9195580.pdf?src-supplier=Avnet, ComponentLink5Description=https://datasheet.ciiva.com/43467/1678782-43467375.pdf?src-supplier=Farnell, ComponentLink5URL=https://datasheet.ciiva.com/43467/1678782-43467375.pdf?src-supplier=Farnell, Composition="Thick Film", Contact Plating=Tin, Depth=0.5mm, Height=0.35mm, Lead Free="Lead Free", Length=1mm, Military Standard=Not, Mount="Surface Mount", Number of Terminations=2, Packaging="Tape and Reel", Power Rating=100mW, Pricing 1="1=0.10000, 10=0.04300, 100=0.01750, 1000=0.00787, 2500=0.00683, 5000=0.00564 (USD)", REACH SVHC="No SVHC", RoHS=Yes, Stock 1=1276231, Supplier 1=Digi-Key, Termination=SMD/SMT, Voltage Rating (DC)=50V, Weight=2.8E-05oz, Width=0.5mm
R16 R17 R18 R19: library part "100k Resistor", "YAGEO         RC0805FR-07100KL            RES, THICK FILM, 100K, 1%, 0.125W, 0805, REEL", Case Code (Imperial)=0805, Case Code (Metric)=2012, Manufacturer=Yageo, Manufacturer Part Number=RC0805FR-07100KL, Max Operating Temperature=155°C, Max Power Dissipation=125mW, Min Operating Temperature=-55°C, Package Quantity=1, Resistance=100kR, Supplier Part Number 1=311-100KCRCT-ND, Temperature Coefficient=100ppm/°C, Tolerance=1%, Voltage Rating=150V, Case/Package=0805, Category="Chip SMD Resistors", ComponentLink1Description=https://datasheet.ciiva.com/11808/0900766b8106beab-11808858.pdf?src-supplier=RSComponents, ComponentLink1URL=https://datasheet.ciiva.com/11808/0900766b8106beab-11808858.pdf?src-supplier=RSComponents, ComponentLink2Description=https://datasheet.ciiva.com/2457/pyu-r-int-thick-7-2457017.pdf?src-supplier=Digi-Key, ComponentLink2URL=https://datasheet.ciiva.com/2457/pyu-r-int-thick-7-2457017.pdf?src-supplier=Digi-Key, ComponentLink3Description=https://datasheet.ciiva.com/12667/rc0805-12667001.pdf?src-supplier=Mouser, ComponentLink3URL=https://datasheet.ciiva.com/12667/rc0805-12667001.pdf?src-supplier=Mouser, ComponentLink4Description=https://datasheet.ciiva.com/2457/pyu-r-int-thick-7-2457018.pdf?src-supplier=Digi-Key, ComponentLink4URL=https://datasheet.ciiva.com/2457/pyu-r-int-thick-7-2457018.pdf?src-supplier=Digi-Key, ComponentLink5Description=https://datasheet.ciiva.com/16747/rc0805-16747226.pdf?src-supplier=Future+Electronics, ComponentLink5URL=https://datasheet.ciiva.com/16747/rc0805-16747226.pdf?src-supplier=Future+Electronics, ComponentLink6Description=https://datasheet.ciiva.com/2457/pyu-r-int-thick-7-2457019.pdf?src-supplier=Digi-Key, ComponentLink6URL=https://datasheet.ciiva.com/2457/pyu-r-int-thick-7-2457019.pdf?src-supplier=Digi-Key, ComponentLink7Description=https://datasheet.ciiva.com/7660/38627-7660796.pdf?src-supplier=Element14, ComponentLink7URL=https://datasheet.ciiva.com/7660/38627-7660796.pdf?src-supplier=Element14, ComponentLink8Description=https://datasheet.ciiva.com/7941/1697719-7941676.pdf?src-supplier=Element14, ComponentLink8URL=https://datasheet.ciiva.com/7941/1697719-7941676.pdf?src-supplier=Element14, ComponentLink9Description=https://datasheet.ciiva.com/7941/1686128-7941677.pdf?src-supplier=Element14, ComponentLink9URL=https://datasheet.ciiva.com/7941/1686128-7941677.pdf?src-supplier=Element14, ComponentLink10Description=https://datasheet.ciiva.com/7941/1697719-7941678.pdf?src-supplier=Element14, ComponentLink10URL=https://datasheet.ciiva.com/7941/1697719-7941678.pdf?src-supplier=Element14, ComponentLink11Description=https://datasheet.ciiva.com/22747/444164-22747534.pdf?src-supplier=Element14, ComponentLink11URL=https://datasheet.ciiva.com/22747/444164-22747534.pdf?src-supplier=Element14, Composition="Thick Film", Depth=1.25mm, Features="Moisture Resistant", Height=0.024inch, Lead Free="Lead Free", Lead Pitch=0.4mm, Length=2mm, Military Standard=Not, Number of Pins=2, Number of Terminations=2, Packaging="Tape and Reel", Power Rating=125mW, Pricing 1="1=0.10000, 10=0.04000, 100=0.01630, 1000=0.00731, 2500=0.00635 (USD)", REACH SVHC=Unknown, RoHS=Yes, Stock 1=4441686, Supplier 1=Digi-Key, Termination=SMD/SMT, Voltage Rating (DC)=150V, Width=0.049inch
R22 R23: library part "5k Resistor", "Res Thick Film 0805 5K Ohm 1% 1/8W ±100ppm/°C Molded SMD SMD Paper T/R", Case Code (Imperial)=0805, Case Code (Metric)=2012, Manufacturer="Vishay Dale", Manufacturer Part Number=CRCW08055K00FKTA, Max Operating Temperature=155°C, Max Power Dissipation=125mW, Min Operating Temperature=-55°C, Package Quantity=5000, Resistance=5kR, Resistor Type="Thick Film", Supplier Part Number 1=541-4321-1-ND, Temperature Coefficient=100ppm/°C, Tolerance=1%, Voltage Rating=150V, Case/Package=0805, Category="Chip SMD Resistors", ComponentLink1Description=https://datasheet.ciiva.com/7112/1747955-7112385.pdf?src-supplier=Newark, ComponentLink1URL=https://datasheet.ciiva.com/7112/1747955-7112385.pdf?src-supplier=Newark, ComponentLink2Description=https://datasheet.ciiva.com/9069/dcrcw-9069004.pdf?src-supplier=Avnet, ComponentLink2URL=https://datasheet.ciiva.com/9069/dcrcw-9069004.pdf?src-supplier=Avnet, ComponentLink3Description=https://datasheet.ciiva.com/28561/1747955-28561708.pdf?src-supplier=Element14, ComponentLink3URL=https://datasheet.ciiva.com/28561/1747955-28561708.pdf?src-supplier=Element14, Contact Plating=Tin,Lead, Features="Automotive AEC-Q200", Height=0.02inch, Lead Free="Contains Lead", Length=0.079inch, Number of Pins=2, Number of Terminations=2, Packaging="Tape and Reel", Power Rating=125mW, Pricing 1="1=0.13000, 10=0.11700, 100=0.04510, 1000=0.01984, 2500=0.01714 (USD)", REACH SVHC=Unknown, RoHS=Yes, Stock 1=28646, Supplier 1=Digi-Key, Termination=SMD/SMT, Voltage Rating (DC)=150V, Weight=0.000194oz, Width=1.25mm
U1: "ARM Microcontrollers - MCU 16/32-BITS MICROS", Case/Package=LQFP, Frequency=84MHz, Manufacturer=STMicroelectronics, Manufacturer Part Number=STM32F401RET6, Max Operating Temperature=85°C, Max Power Dissipation=313mW, Max Supply Voltage=3.6V, Min Operating Temperature=-40°C, Min Supply Voltage=1.7V, Operating Supply Voltage=3.3V, Package Quantity=960, Supplier Part Number 1=497-17429-ND, Category=Microcontrollers, ComponentLink1Description=http://www.farnell.com/datasheets/1899788.pdf?src-supplier=Farnell, ComponentLink1URL=http://www.farnell.com/datasheets/1899788.pdf?src-supplier=Farnell, ComponentLink2Description=http://www.mouser.com/ds/2/389/stm32f401re-956236.pdf?src-supplier=Mouser, ComponentLink2URL=http://www.mouser.com/ds/2/389/stm32f401re-956236.pdf?src-supplier=Mouser, ComponentLink3Description=http://www.farnell.com/datasheets/1899788.pdf?src-supplier=Element14, ComponentLink3URL=http://www.farnell.com/datasheets/1899788.pdf?src-supplier=Element14, ComponentLink4Description=http://www.st.com/st-web-ui/static/active/en/resource/technical/document/datasheet/DM00102166.pdf?src-supplier=Avnet, ComponentLink4URL=http://www.st.com/st-web-ui/static/active/en/resource/technical/document/datasheet/DM00102166.pdf?src-supplier=Avnet, ComponentLink5Description=http://www.st.com/content/ccc/resource/technical/document/errata_sheet/df/f5/fd/26/37/db/42/2b/DM00095523.pdf/files/DM00095523.pdf/jcr:content/translations/en.DM00095523.pdf?src-supplier=Digi-Key, ComponentLink5URL=http://www.st.com/content/ccc/resource/technical/document/errata_sheet/df/f5/fd/26/37/db/42/2b/DM00095523.pdf/files/DM00095523.pdf/jcr:content/translations/en.DM00095523.pdf?src-supplier=Digi-Key, ComponentLink6Description=http://www.farnell.com/datasheets/1899788.pdf?src-supplier=Newark, ComponentLink6URL=http://www.farnell.com/datasheets/1899788.pdf?src-supplier=Newark, Core Architecture=ARM, Data Bus Width=32b, Interface=I2C,SPI,USB,IrDA,SDIO,UART,USART,LIN,I2S, Lead Free="Lead Free", Max Frequency=84MHz, Memory Size=512KB, Memory Type=FLASH, Number of I/Os=50, Number of Pins=64, Number of Programmable I/O=50, Number of Timers/Counters=8, Oscillator Type=Internal, Packaging=Tray, Peripherals="Brown-out Detect/Reset,POR,PWM,WDT,DMA", Pricing 1="1=6.43000, 10=5.80700, 25=5.53680, 100=4.80740, 250=4.59136, 500=4.18624, 1000=3.64608, 2500=3.51104, 5000=3.37600 (USD)", Radiation Hardening=No, RAM Size=96KB, REACH SVHC="No SVHC", RoHS=Yes, Stock 1=2313, Supplier 1=Digi-Key, Watchdog Timer=Yes, Weight=0.012088oz